# EAGLE board Zcontrol5XR2_Production (EAGLE 5.10)
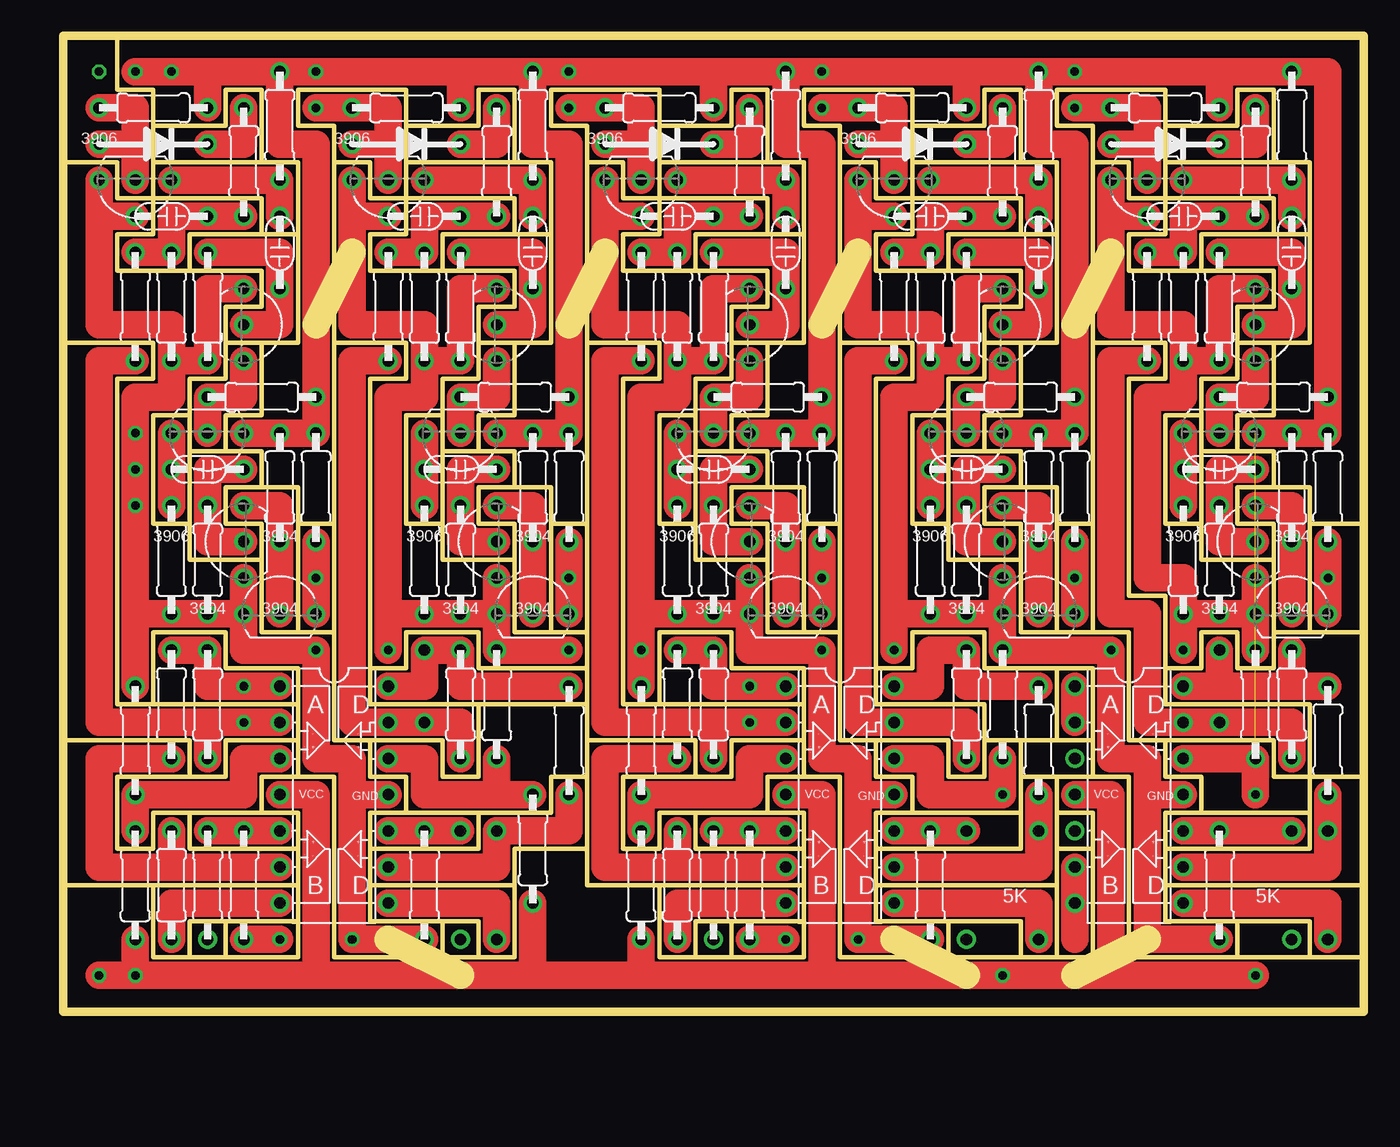
[diagram p0: board, top side]
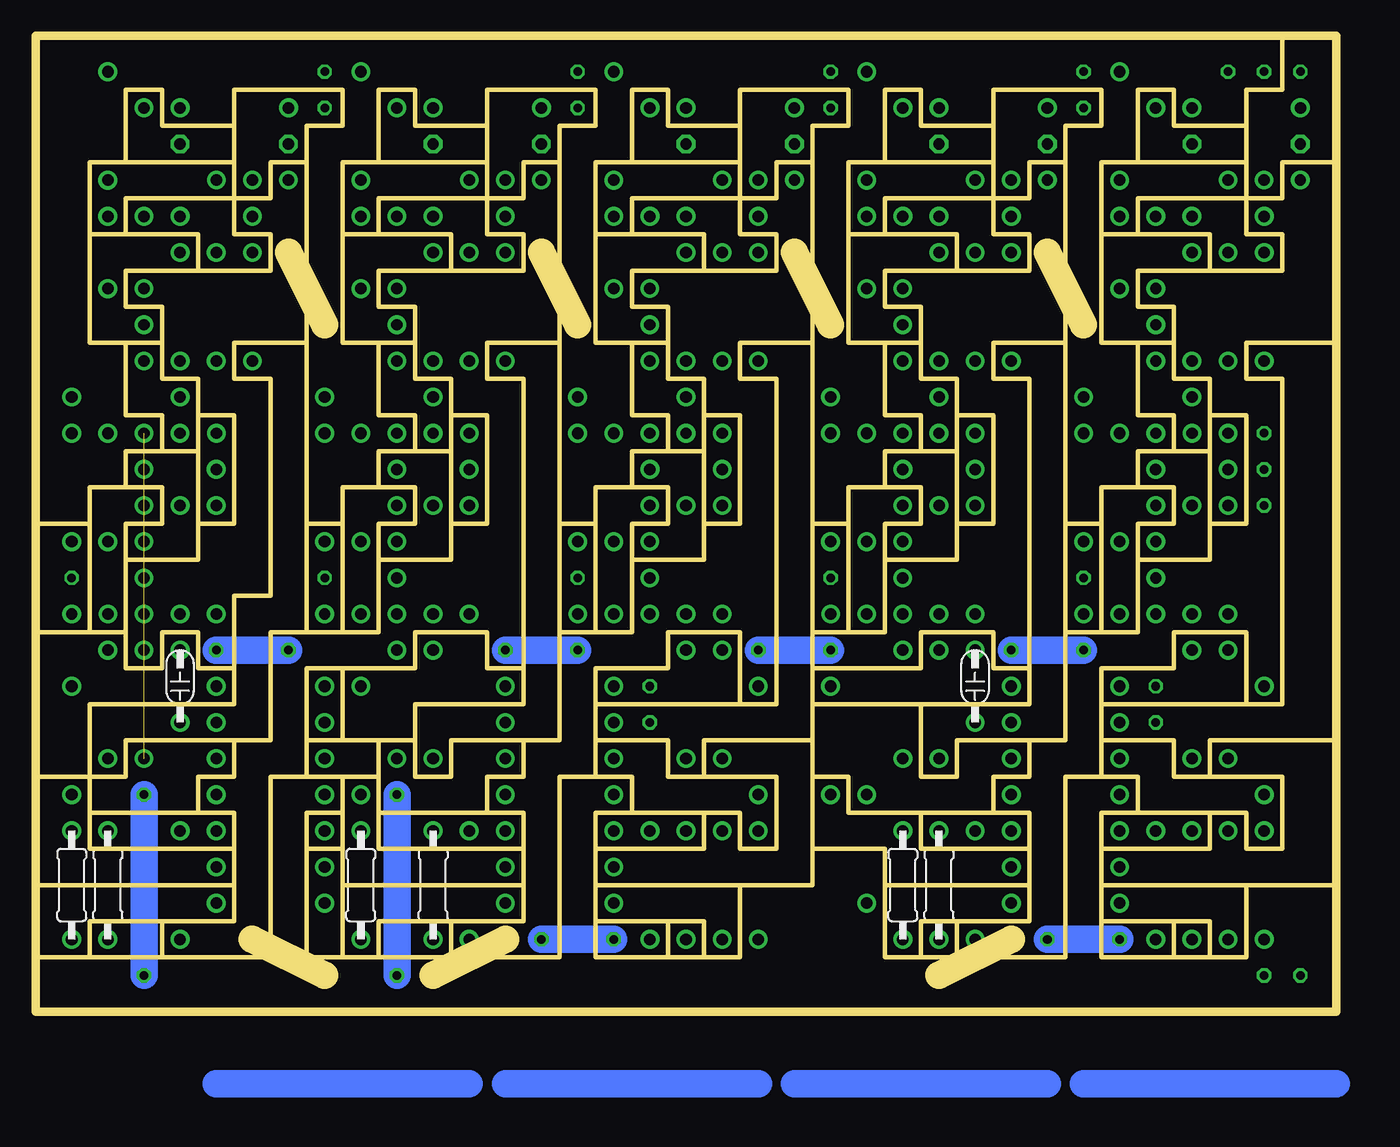
[diagram p1: board, bottom side, seen from below]

Size 91.44 x 68.58 mm. Coordinates in mm from the lower left corner, seen from the top.
Outline: 91.44,3.81 91.44,0 0,0 0,8.89
Outline: 91.44,3.81 91.44,8.89
Outline: 91.44,8.89 91.44,16.51
Outline: 91.44,16.51 91.44,26.67
Outline: 91.44,26.67 91.44,34.29
Outline: 91.44,34.29 91.44,68.58 3.81,68.58
Outline: 3.81,68.58 0,68.58 0,59.69
Outline: 0,59.69 0,46.99
Outline: 0,46.99 0,19.05
Outline: 0,19.05 0,8.89
Outline: 0,8.89 6.35,8.89
Outline: 6.35,8.89 6.35,3.81 8.89,3.81
Outline: 8.89,3.81 11.43,3.81
Outline: 11.43,3.81 16.51,3.81 16.51,6.35
Outline: 16.51,6.35 16.51,8.89
Outline: 16.51,8.89 16.51,11.43
Outline: 16.51,11.43 16.51,13.97 13.97,13.97
Outline: 13.97,13.97 13.97,16.51 16.51,16.51
Outline: 16.51,16.51 19.05,16.51 19.05,3.81 26.67,3.81
Outline: 26.67,3.81 29.21,3.81
Outline: 29.21,3.81 31.75,3.81 31.75,8.89
Outline: 44.45,3.81 41.91,3.81 41.91,8.89
Outline: 44.45,3.81 46.99,3.81
Outline: 46.99,3.81 52.07,3.81 52.07,6.35
Outline: 52.07,6.35 52.07,8.89
Outline: 52.07,8.89 52.07,11.43
Outline: 52.07,11.43 52.07,13.97 49.53,13.97
Outline: 49.53,13.97 49.53,16.51 52.07,16.51
Outline: 52.07,16.51 54.61,16.51 54.61,3.81 62.23,3.81
Outline: 62.23,3.81 67.31,3.81
Outline: 67.31,3.81 69.85,3.81
Outline: 69.85,3.81 72.39,3.81 72.39,11.43
Outline: 72.39,11.43 72.39,13.97 69.85,13.97
Outline: 69.85,13.97 69.85,16.51
Outline: 69.85,16.51 72.39,16.51
Outline: 72.39,16.51 74.93,16.51 74.93,3.81 82.55,3.81
Outline: 82.55,3.81 87.63,3.81
Outline: 87.63,3.81 91.44,3.81
Outline: 62.23,3.81 62.23,6.35
Outline: 62.23,6.35 57.15,6.35 57.15,8.89
Outline: 57.15,8.89 57.15,11.43
Outline: 57.15,11.43 57.15,13.97 59.69,13.97
Outline: 59.69,13.97 59.69,16.51 57.15,16.51 57.15,19.05
Outline: 57.15,19.05 54.61,19.05 54.61,26.67
Outline: 54.61,26.67 52.07,26.67
Outline: 52.07,26.67 49.53,26.67 49.53,31.75
Outline: 44.45,41.91 41.91,41.91 41.91,34.29 44.45,34.29
Outline: 44.45,41.91 44.45,44.45 46.99,44.45 46.99,46.99
Outline: 46.99,46.99 46.99,49.53 49.53,49.53 49.53,52.07 44.45,52.07
Outline: 44.45,52.07 39.37,52.07 39.37,54.61 41.91,54.61 41.91,57.15
Outline: 41.91,57.15 39.37,57.15 39.37,59.69 36.83,59.69
Outline: 36.83,59.69 36.83,46.99
Outline: 36.83,46.99 41.91,46.99 41.91,44.45 39.37,44.45 39.37,21.59 41.91,21.59
Outline: 41.91,21.59 41.91,26.67 46.99,26.67 46.99,24.13 52.07,24.13 52.07,21.59
Outline: 52.07,21.59 52.07,19.05
Outline: 52.07,19.05 52.07,16.51
Outline: 52.07,21.59 41.91,21.59
Outline: 52.07,19.05 46.99,19.05 46.99,16.51 44.45,16.51
Outline: 44.45,16.51 44.45,19.05 36.83,19.05
Outline: 36.83,19.05 36.83,21.59
Outline: 36.83,21.59 36.83,24.13
Outline: 36.83,24.13 36.83,26.67
Outline: 36.83,26.67 36.83,34.29
Outline: 36.83,34.29 36.83,46.99
Outline: 52.07,8.89 41.91,8.89
Outline: 44.45,3.81 44.45,6.35 46.99,6.35
Outline: 46.99,6.35 52.07,6.35
Outline: 46.99,6.35 46.99,3.81
Outline: 69.85,3.81 69.85,8.89
Outline: 69.85,8.89 69.85,11.43
Outline: 69.85,11.43 69.85,13.97
Outline: 72.39,11.43 69.85,11.43
Outline: 69.85,8.89 57.15,8.89
Outline: 62.23,6.35 67.31,6.35 67.31,3.81
Outline: 57.15,11.43 67.31,11.43 67.31,13.97
Outline: 67.31,13.97 59.69,13.97
Outline: 57.15,19.05 62.23,19.05 62.23,16.51 64.77,16.51 64.77,19.05
Outline: 64.77,19.05 67.31,19.05
Outline: 67.31,19.05 67.31,16.51
Outline: 67.31,16.51 67.31,13.97
Outline: 69.85,16.51 67.31,16.51
Outline: 72.39,16.51 72.39,19.05
Outline: 72.39,19.05 69.85,19.05
Outline: 69.85,19.05 67.31,19.05
Outline: 72.39,19.05 72.39,24.13 69.85,24.13
Outline: 69.85,24.13 69.85,19.05
Outline: 64.77,19.05 64.77,21.59 57.15,21.59 57.15,24.13
Outline: 57.15,24.13 59.69,24.13 59.69,26.67 64.77,26.67 64.77,24.13 69.85,24.13
Outline: 91.44,8.89 77.47,8.89
Outline: 77.47,8.89 77.47,6.35 82.55,6.35
Outline: 82.55,6.35 87.63,6.35 87.63,3.81
Outline: 82.55,3.81 82.55,6.35
Outline: 77.47,8.89 77.47,11.43
Outline: 77.47,11.43 77.47,13.97 80.01,13.97
Outline: 80.01,13.97 80.01,16.51 77.47,16.51 77.47,19.05
Outline: 77.47,19.05 74.93,19.05 74.93,26.67 72.39,26.67
Outline: 72.39,26.67 69.85,26.67
Outline: 69.85,26.67 67.31,26.67 67.31,31.75
Outline: 67.31,31.75 62.23,31.75 62.23,34.29
Outline: 62.23,34.29 59.69,34.29 59.69,41.91 62.23,41.91
Outline: 62.23,41.91 62.23,44.45 64.77,44.45 64.77,46.99
Outline: 64.77,46.99 64.77,49.53 67.31,49.53 67.31,52.07 62.23,52.07
Outline: 62.23,52.07 57.15,52.07 57.15,54.61 59.69,54.61 59.69,57.15
Outline: 59.69,57.15 57.15,57.15 57.15,59.69 54.61,59.69
Outline: 54.61,59.69 54.61,46.99
Outline: 54.61,46.99 59.69,46.99 59.69,44.45 57.15,44.45 57.15,24.13
Outline: 72.39,26.67 72.39,34.29
Outline: 72.39,34.29 69.85,34.29
Outline: 69.85,34.29 69.85,26.67
Outline: 69.85,34.29 69.85,36.83 67.31,36.83
Outline: 67.31,36.83 64.77,36.83 64.77,34.29 67.31,34.29 67.31,31.75
Outline: 67.31,36.83 67.31,39.37 64.77,39.37
Outline: 64.77,39.37 62.23,39.37
Outline: 62.23,39.37 62.23,34.29
Outline: 62.23,39.37 62.23,41.91
Outline: 64.77,39.37 64.77,41.91 67.31,41.91 67.31,46.99
Outline: 67.31,46.99 69.85,46.99 69.85,54.61
Outline: 67.31,46.99 64.77,46.99
Outline: 72.39,46.99 72.39,59.69
Outline: 72.39,59.69 72.39,62.23 69.85,62.23 69.85,64.77 77.47,64.77 77.47,62.23
Outline: 77.47,62.23 82.55,62.23 82.55,64.77 85.09,64.77 85.09,59.69
Outline: 87.63,54.61 87.63,59.69 85.09,59.69
Outline: 87.63,54.61 87.63,46.99 85.09,46.99
Outline: 82.55,39.37 82.55,41.91 85.09,41.91 85.09,46.99
Outline: 82.55,39.37 85.09,39.37 85.09,36.83
Outline: 69.85,54.61 69.85,59.69 67.31,59.69
Outline: 59.69,62.23 64.77,62.23 64.77,64.77 67.31,64.77 67.31,59.69
Outline: 59.69,62.23 59.69,64.77 52.07,64.77 52.07,62.23 54.61,62.23 54.61,59.69
Outline: 69.85,54.61 67.31,54.61
Outline: 67.31,54.61 62.23,54.61 62.23,52.07
Outline: 67.31,54.61 67.31,57.15 59.69,57.15
Outline: 59.69,57.15 59.69,59.69
Outline: 59.69,62.23 59.69,59.69
Outline: 59.69,59.69 67.31,59.69
Outline: 36.83,59.69 36.83,62.23 34.29,62.23 34.29,64.77 41.91,64.77 41.91,62.23
Outline: 41.91,59.69 41.91,57.15
Outline: 41.91,57.15 49.53,57.15 49.53,54.61
Outline: 49.53,54.61 44.45,54.61 44.45,52.07
Outline: 41.91,59.69 49.53,59.69
Outline: 49.53,59.69 52.07,59.69 52.07,54.61
Outline: 52.07,54.61 52.07,46.99 49.53,46.99
Outline: 49.53,46.99 49.53,41.91 46.99,41.91 46.99,39.37
Outline: 46.99,39.37 49.53,39.37 49.53,36.83
Outline: 49.53,46.99 46.99,46.99
Outline: 49.53,54.61 52.07,54.61
Outline: 49.53,59.69 49.53,64.77 46.99,64.77 46.99,62.23 41.91,62.23
Outline: 41.91,62.23 41.91,59.69
Outline: 85.09,59.69 77.47,59.69
Outline: 77.47,59.69 77.47,62.23
Outline: 87.63,54.61 85.09,54.61
Outline: 85.09,54.61 85.09,57.15 77.47,57.15
Outline: 77.47,57.15 77.47,59.69
Outline: 77.47,57.15 74.93,57.15 74.93,59.69 72.39,59.69
Outline: 24.13,62.23 24.13,59.69
Outline: 24.13,59.69 31.75,59.69
Outline: 31.75,59.69 31.75,64.77 29.21,64.77 29.21,62.23 24.13,62.23
Outline: 24.13,62.23 24.13,64.77 16.51,64.77 16.51,62.23 19.05,62.23 19.05,59.69
Outline: 19.05,59.69 21.59,59.69 21.59,57.15 24.13,57.15
Outline: 24.13,57.15 24.13,59.69
Outline: 31.75,59.69 34.29,59.69 34.29,54.61
Outline: 34.29,54.61 34.29,46.99 31.75,46.99
Outline: 31.75,46.99 31.75,41.91 29.21,41.91 29.21,39.37
Outline: 29.21,39.37 31.75,39.37 31.75,36.83
Outline: 0,59.69 3.81,59.69 3.81,57.15 6.35,57.15
Outline: 6.35,57.15 6.35,59.69
Outline: 6.35,59.69 6.35,62.23
Outline: 6.35,62.23 6.35,64.77 3.81,64.77 3.81,68.58
Outline: 13.97,59.69 16.51,59.69 16.51,54.61
Outline: 16.51,54.61 16.51,46.99 13.97,46.99
Outline: 13.97,46.99 13.97,41.91 11.43,41.91 11.43,39.37
Outline: 11.43,39.37 13.97,39.37 13.97,36.83
Outline: 19.05,46.99 19.05,59.69
Outline: 13.97,59.69 13.97,64.77 11.43,64.77 11.43,62.23 6.35,62.23
Outline: 6.35,59.69 13.97,59.69
Outline: 6.35,57.15 13.97,57.15 13.97,54.61
Outline: 13.97,54.61 16.51,54.61
Outline: 24.13,57.15 31.75,57.15 31.75,54.61
Outline: 31.75,54.61 34.29,54.61
Outline: 6.35,57.15 6.35,54.61 3.81,54.61 3.81,52.07 8.89,52.07
Outline: 8.89,52.07 8.89,54.61 13.97,54.61
Outline: 24.13,57.15 24.13,54.61 21.59,54.61 21.59,52.07 26.67,52.07
Outline: 26.67,52.07 26.67,54.61 31.75,54.61
Outline: 19.05,46.99 24.13,46.99 24.13,44.45 21.59,44.45 21.59,24.13
Outline: 21.59,24.13 21.59,21.59 29.21,21.59
Outline: 29.21,21.59 29.21,16.51 26.67,16.51 26.67,19.05 21.59,19.05
Outline: 21.59,19.05 19.05,19.05 19.05,26.67
Outline: 19.05,26.67 19.05,34.29
Outline: 19.05,34.29 19.05,46.99
Outline: 6.35,21.59 3.81,21.59 3.81,44.45 6.35,44.45 6.35,46.99 0,46.99
Outline: 6.35,21.59 16.51,21.59
Outline: 16.51,21.59 16.51,19.05
Outline: 16.51,19.05 11.43,19.05 11.43,16.51 8.89,16.51
Outline: 8.89,16.51 8.89,19.05 0,19.05
Outline: 13.97,46.99 11.43,46.99
Outline: 11.43,46.99 11.43,49.53 13.97,49.53 13.97,52.07 8.89,52.07
Outline: 31.75,46.99 29.21,46.99
Outline: 29.21,46.99 29.21,49.53 31.75,49.53 31.75,52.07 26.67,52.07
Outline: 85.09,46.99 82.55,46.99
Outline: 82.55,46.99 82.55,49.53 85.09,49.53 85.09,52.07 80.01,52.07
Outline: 80.01,52.07 80.01,54.61 85.09,54.61
Outline: 80.01,52.07 74.93,52.07 74.93,54.61 77.47,54.61 77.47,57.15
Outline: 80.01,34.29 77.47,34.29 77.47,41.91 80.01,41.91
Outline: 80.01,34.29 80.01,39.37
Outline: 80.01,39.37 80.01,41.91
Outline: 44.45,34.29 44.45,39.37
Outline: 44.45,39.37 44.45,41.91
Outline: 26.67,41.91 24.13,41.91 24.13,34.29 26.67,34.29
Outline: 26.67,41.91 26.67,39.37
Outline: 26.67,39.37 26.67,34.29
Outline: 8.89,34.29 6.35,34.29 6.35,41.91 8.89,41.91
Outline: 8.89,34.29 8.89,39.37
Outline: 8.89,39.37 8.89,41.91
Outline: 8.89,39.37 11.43,39.37
Outline: 26.67,39.37 29.21,39.37
Outline: 46.99,39.37 44.45,39.37
Outline: 82.55,39.37 80.01,39.37
Outline: 80.01,41.91 80.01,44.45 82.55,44.45 82.55,46.99
Outline: 8.89,34.29 8.89,31.75 13.97,31.75
Outline: 13.97,31.75 13.97,34.29 11.43,34.29 11.43,36.83 13.97,36.83
Outline: 26.67,34.29 26.67,31.75 31.75,31.75
Outline: 31.75,31.75 31.75,34.29 29.21,34.29 29.21,36.83 31.75,36.83
Outline: 49.53,31.75 49.53,34.29 46.99,34.29 46.99,36.83 49.53,36.83
Outline: 49.53,31.75 44.45,31.75 44.45,34.29
Outline: 80.01,34.29 80.01,31.75 85.09,31.75
Outline: 85.09,31.75 85.09,34.29 82.55,34.29 82.55,36.83 85.09,36.83
Outline: 19.05,26.67 16.51,26.67
Outline: 16.51,26.67 16.51,34.29
Outline: 16.51,34.29 19.05,34.29
Outline: 36.83,26.67 34.29,26.67
Outline: 34.29,26.67 34.29,34.29
Outline: 34.29,34.29 36.83,34.29
Outline: 54.61,26.67 54.61,34.29
Outline: 54.61,34.29 52.07,34.29
Outline: 52.07,34.29 52.07,26.67
Outline: 87.63,26.67 91.44,26.67
Outline: 87.63,26.67 87.63,34.29
Outline: 87.63,34.29 91.44,34.29
Outline: 87.63,34.29 87.63,36.83 85.09,36.83
Outline: 85.09,31.75 85.09,26.67
Outline: 85.09,26.67 87.63,26.67
Outline: 52.07,34.29 52.07,36.83 49.53,36.83
Outline: 34.29,26.67 31.75,26.67 31.75,31.75
Outline: 34.29,34.29 34.29,36.83 31.75,36.83
Outline: 16.51,26.67 13.97,26.67 13.97,31.75
Outline: 16.51,34.29 16.51,36.83 13.97,36.83
Outline: 54.61,34.29 54.61,46.99
Outline: 72.39,34.29 72.39,46.99
Outline: 72.39,46.99 77.47,46.99 77.47,44.45 74.93,44.45 74.93,29.21 77.47,29.21 77.47,24.13
Outline: 77.47,24.13 77.47,21.59 87.63,21.59 87.63,16.51
Outline: 87.63,16.51 85.09,16.51 85.09,19.05 77.47,19.05
Outline: 80.01,13.97 87.63,13.97
Outline: 87.63,13.97 87.63,16.51
Outline: 87.63,16.51 91.44,16.51
Outline: 77.47,11.43 87.63,11.43 87.63,13.97
Outline: 77.47,24.13 80.01,24.13 80.01,26.67 82.55,26.67 82.55,24.13 85.09,24.13 85.09,26.67
Outline: 41.91,8.89 36.83,8.89 36.83,11.43
Outline: 36.83,11.43 36.83,16.51
Outline: 36.83,16.51 36.83,19.05
Outline: 44.45,16.51 39.37,16.51 39.37,11.43 41.91,11.43 41.91,13.97 44.45,13.97
Outline: 44.45,13.97 44.45,11.43 52.07,11.43
Outline: 49.53,13.97 44.45,13.97
Outline: 21.59,19.05 21.59,16.51 24.13,16.51 24.13,13.97
Outline: 24.13,13.97 21.59,13.97 21.59,11.43
Outline: 21.59,11.43 21.59,8.89
Outline: 21.59,8.89 21.59,6.35 26.67,6.35
Outline: 26.67,6.35 26.67,3.81
Outline: 29.21,3.81 29.21,6.35 26.67,6.35
Outline: 21.59,8.89 31.75,8.89
Outline: 31.75,8.89 31.75,11.43 36.83,11.43
Outline: 21.59,11.43 29.21,11.43 29.21,13.97
Outline: 29.21,13.97 34.29,13.97 34.29,16.51 36.83,16.51
Outline: 29.21,13.97 24.13,13.97
Outline: 29.21,21.59 36.83,21.59
Outline: 36.83,24.13 29.21,24.13 29.21,26.67 24.13,26.67 24.13,24.13 21.59,24.13
Outline: 16.51,21.59 16.51,24.13 11.43,24.13 11.43,26.67 6.35,26.67 6.35,21.59
Outline: 8.89,41.91 8.89,44.45 11.43,44.45 11.43,46.99
Outline: 11.43,3.81 11.43,6.35
Outline: 11.43,6.35 8.89,6.35 8.89,3.81
Outline: 6.35,8.89 16.51,8.89
Outline: 16.51,6.35 11.43,6.35
Outline: 16.51,11.43 8.89,11.43 8.89,13.97
Outline: 8.89,13.97 6.35,13.97 6.35,11.43 3.81,11.43 3.81,16.51 8.89,16.51
Outline: 13.97,13.97 8.89,13.97
Outline: 16.51,19.05 16.51,16.51
Outline: 26.67,41.91 26.67,44.45 29.21,44.45 29.21,46.99
Copper layers (1*16): Top 0.035mm / dielectric 1.5mm / Bottom 0.035mm
Design rules "default": minimum track width 10mil, minimum drill 24mil, track to track 8mil, track to pad 8mil, pad to pad 8mil, via to via 8mil, smd to smd 8mil, copper to edge 40mil, drill to drill 8mil, minimum pad ring 10mil, minimum via ring 8mil, stop-mask expansion 4mil, vias tented up to drill 0mil, thermal gap 10mil
Milling: 7 lines

## Footprints (pad centres in the part's own frame; a part is rotated, then mirrored left to right if it is on the bottom)
SMALL-CAPACITOR = drill 0.813 round: IN1 0,0; IN2 5.08,0
TRANSISTOR = drill 0.8 round: P$1 0,0; P$2 2.54,0; P$3 -2.54,0
DIODE = drill 0.8 octagon: P$1 -3.81,0; P$2 3.81,0
RESISTOR = drill 0.813 round: IN1 -3.81,0; IN2 3.81,0
LM324-QUAD-OPAMP = drill 0.813 round: AMINUS -3.81,5.08; AOUT -3.81,7.62; APLUS -3.81,2.54; BMINUS -3.81,-5.08; BOUT -3.81,-7.62; BPLUS -3.81,-2.54; CMINUS 3.81,5.08; COUT 3.81,7.62; CPLUS 3.81,2.54; DMINUS 3.81,-5.08; DOUT 3.81,-7.62; DPLUS 3.81,-2.54; GND 3.81,0; VCC -3.81,0

## Placement (x,y rotation side)
E$2  50nF  [SMALL-CAPACITOR]  25.4,20.32 90 bottom
E$3  [TRANSISTOR]  5.08,58.42 180 top
E$5  [DIODE]  6.35,60.96 0 top
E$7  4k  [RESISTOR]  6.35,63.5 180 top
E$9  910  [RESISTOR]  12.7,59.69 270 top
E$10  2.2uF  [SMALL-CAPACITOR]  10.16,55.88 180 top
E$11  [LM324-QUAD-OPAMP]  19.05,15.24 0 top
E$15  100k  [RESISTOR]  7.62,49.53 90 top
E$16  100k  [RESISTOR]  5.08,49.53 270 top
E$18  [TRANSISTOR]  22.86,58.42 180 top
E$19  200k  [RESISTOR]  10.16,21.59 270 top
E$20  2k  [RESISTOR]  5.08,19.05 90 top
E$21  5k  [RESISTOR]  5.08,8.89 270 top
E$22  2k  [RESISTOR]  7.62,21.59 270 top
E$23  2k  [RESISTOR]  7.62,8.89 270 top
E$29  2k  [RESISTOR]  12.7,8.89 270 top
E$30  20k  [RESISTOR]  10.16,8.89 270 top
E$31  10K  [RESISTOR]  15.24,62.23 270 top
E$32  500Pf  [SMALL-CAPACITOR]  15.24,50.8 90 top
E$33  100K  [RESISTOR]  10.16,49.53 90 top
E$34  [TRANSISTOR]  12.7,48.26 270 top
E$35  2k  [RESISTOR]  13.97,43.18 0 top
E$36  [TRANSISTOR]  10.16,40.64 180 top
E$37  22Pf  [SMALL-CAPACITOR]  12.7,38.1 180 top
E$38  4k  [RESISTOR]  24.13,63.5 180 top
E$40  100k  [RESISTOR]  10.16,31.75 90 top
E$43  [TRANSISTOR]  12.7,33.02 90 top
E$44  2k  [RESISTOR]  15.24,36.83 90 top
E$45  [TRANSISTOR]  15.24,27.94 0 top
E$46  2k  [RESISTOR]  17.78,36.83 90 top
E$47  200k  [RESISTOR]  27.94,21.59 270 top
E$48  2k  [RESISTOR]  30.48,21.59 90 top
E$49  5k  [RESISTOR]  33.02,11.43 270 top
E$50  2k  [RESISTOR]  35.56,19.05 270 top
E$52  2k  [RESISTOR]  30.48,8.89 270 bottom
E$53  2k  [RESISTOR]  25.4,8.89 270 top
E$54  20k  [RESISTOR]  27.94,8.89 270 bottom
E$55  [DIODE]  24.13,60.96 0 top
E$56  910  [RESISTOR]  30.48,59.69 270 top
E$57  2.2uF  [SMALL-CAPACITOR]  27.94,55.88 180 top
E$58  100k  [RESISTOR]  25.4,49.53 90 top
E$59  100k  [RESISTOR]  22.86,49.53 270 top
E$60  10K  [RESISTOR]  33.02,62.23 270 top
E$61  500Pf  [SMALL-CAPACITOR]  33.02,50.8 90 top
E$62  100K  [RESISTOR]  27.94,49.53 90 top
E$63  [TRANSISTOR]  30.48,48.26 270 top
E$64  2k  [RESISTOR]  31.75,43.18 0 top
E$65  [TRANSISTOR]  27.94,40.64 180 top
E$66  100k  [RESISTOR]  27.94,31.75 90 top
E$67  [TRANSISTOR]  30.48,33.02 90 top
E$68  2k  [RESISTOR]  33.02,36.83 90 top
E$69  [TRANSISTOR]  33.02,27.94 0 top
E$70  2k  [RESISTOR]  35.56,36.83 90 top
E$71  2k  [RESISTOR]  25.4,31.75 270 top
E$72  22Pf  [SMALL-CAPACITOR]  30.48,38.1 180 top
E$73  [LM324-QUAD-OPAMP]  54.61,15.24 0 top
E$74  [TRANSISTOR]  40.64,58.42 180 top
E$75  2k  [RESISTOR]  7.62,31.75 270 top
E$76  4k  [RESISTOR]  41.91,63.5 180 top
E$77  [DIODE]  41.91,60.96 0 top
E$78  910  [RESISTOR]  48.26,59.69 270 top
E$79  2.2uF  [SMALL-CAPACITOR]  45.72,55.88 180 top
E$80  100k  [RESISTOR]  43.18,49.53 90 top
E$81  100k  [RESISTOR]  40.64,49.53 270 top
E$82  200k  [RESISTOR]  45.72,21.59 270 top
E$83  2k  [RESISTOR]  40.64,19.05 90 top
E$84  5k  [RESISTOR]  40.64,8.89 270 top
E$85  2k  [RESISTOR]  43.18,21.59 270 top
E$86  2k  [RESISTOR]  43.18,8.89 270 top
E$87  2k  [RESISTOR]  48.26,8.89 270 top
E$88  20k  [RESISTOR]  45.72,8.89 270 top
E$89  10K  [RESISTOR]  50.8,62.23 270 top
E$90  500Pf  [SMALL-CAPACITOR]  50.8,50.8 90 top
E$91  100K  [RESISTOR]  45.72,49.53 90 top
E$92  [TRANSISTOR]  48.26,48.26 270 top
E$93  2k  [RESISTOR]  49.53,43.18 0 top
E$94  [TRANSISTOR]  45.72,40.64 180 top
E$95  100k  [RESISTOR]  45.72,31.75 90 top
E$96  [TRANSISTOR]  48.26,33.02 90 top
E$97  2k  [RESISTOR]  50.8,36.83 90 top
E$98  [TRANSISTOR]  50.8,27.94 0 top
E$99  2k  [RESISTOR]  53.34,36.83 90 top
E$100  200k  [RESISTOR]  86.36,21.59 270 top
E$101  200k  [RESISTOR]  63.5,21.59 270 top
E$102  2k  [RESISTOR]  66.04,21.59 90 top
E$104  2k  [RESISTOR]  68.58,19.05 270 top
E$105  2k  [RESISTOR]  68.58,8.89 270 bottom
E$106  2k  [RESISTOR]  60.96,8.89 270 top
E$107  20k  [RESISTOR]  63.5,8.89 270 bottom
E$108  2k  [RESISTOR]  43.18,31.75 270 top
E$109  22Pf  [SMALL-CAPACITOR]  48.26,38.1 180 top
E$110  [TRANSISTOR]  58.42,58.42 180 top
E$111  4k  [RESISTOR]  59.69,63.5 180 top
E$112  [DIODE]  59.69,60.96 0 top
E$113  910  [RESISTOR]  66.04,59.69 270 top
E$114  2.2uF  [SMALL-CAPACITOR]  63.5,55.88 180 top
E$115  100k  [RESISTOR]  60.96,49.53 90 top
E$116  100k  [RESISTOR]  58.42,49.53 270 top
E$117  10K  [RESISTOR]  68.58,62.23 270 top
E$118  500Pf  [SMALL-CAPACITOR]  68.58,50.8 90 top
E$119  100K  [RESISTOR]  63.5,49.53 90 top
E$120  [TRANSISTOR]  66.04,48.26 270 top
E$121  2k  [RESISTOR]  67.31,43.18 0 top
E$122  [TRANSISTOR]  63.5,40.64 180 top
E$123  100k  [RESISTOR]  63.5,31.75 90 top
E$124  [TRANSISTOR]  66.04,33.02 90 top
E$125  2k  [RESISTOR]  68.58,36.83 90 top
E$126  [TRANSISTOR]  68.58,27.94 0 top
E$127  2k  [RESISTOR]  71.12,36.83 90 top
E$128  2k  [RESISTOR]  60.96,31.75 270 top
E$129  22Pf  [SMALL-CAPACITOR]  66.04,38.1 180 top
E$156  [LM324-QUAD-OPAMP]  74.93,15.24 0 top
E$157  50nF  [SMALL-CAPACITOR]  81.28,20.32 90 bottom
E$159  2k  [RESISTOR]  83.82,21.59 90 top
E$161  2k  [RESISTOR]  88.9,19.05 270 top
E$162  2k  [RESISTOR]  88.9,8.89 270 bottom
E$163  2k  [RESISTOR]  81.28,8.89 270 top
E$166  20k  [RESISTOR]  86.36,8.89 270 bottom
E$167  [TRANSISTOR]  76.2,58.42 180 top
E$168  4k  [RESISTOR]  77.47,63.5 180 top
E$169  [DIODE]  77.47,60.96 0 top
E$170  910  [RESISTOR]  83.82,59.69 270 top
E$171  2.2uF  [SMALL-CAPACITOR]  81.28,55.88 180 top
E$172  100k  [RESISTOR]  78.74,49.53 90 top
E$173  100k  [RESISTOR]  76.2,49.53 270 top
E$174  10K  [RESISTOR]  86.36,62.23 270 top
E$175  500Pf  [SMALL-CAPACITOR]  86.36,50.8 90 top
E$176  100K  [RESISTOR]  81.28,49.53 90 top
E$177  [TRANSISTOR]  83.82,48.26 270 top
E$178  2k  [RESISTOR]  85.09,43.18 0 top
E$179  [TRANSISTOR]  81.28,40.64 180 top
E$180  100k  [RESISTOR]  81.28,31.75 90 top
E$181  [TRANSISTOR]  83.82,33.02 90 top
E$182  2k  [RESISTOR]  86.36,36.83 90 top
E$183  [TRANSISTOR]  86.36,27.94 0 top
E$184  2k  [RESISTOR]  88.9,36.83 90 top
E$185  2k  [RESISTOR]  78.74,31.75 270 top
E$186  22Pf  [SMALL-CAPACITOR]  83.82,38.1 180 top

## Library data of the parts
E$2 E$3 E$5 E$7 E$9-E$11 E$15 E$16 E$18-E$23 E$29-E$38 E$40 E$43-E$50 E$52-E$102 E$104-E$129 E$156 E$157 E$159 E$161-E$163 E$166-E$186 = RussellLibrary

## Nets
GND4: E$3.P$2 E$10.IN2 E$11.GND E$15.IN1 E$18.P$2 E$20.IN2 E$29.IN2 E$33.IN1 E$34.P$3 E$40.IN1 E$43.P$3 E$45.P$3 E$48.IN2 E$53.IN2 E$57.IN2 E$58.IN1 E$62.IN1 E$63.P$3 E$66.IN1 E$67.P$3 E$69.P$3 E$73.GND E$74.P$2 E$79.IN2 E$80.IN1 E$83.IN2 E$87.IN2 E$91.IN1 E$92.P$3 E$95.IN1 E$96.P$3 E$98.P$3 E$102.IN2 E$106.IN2 E$110.P$2 E$114.IN2 E$115.IN1 E$119.IN1 E$120.P$3 E$123.IN1 E$124.P$3 E$126.P$3 E$156.GND E$159.IN2 E$163.IN2 E$167.P$2 E$171.IN2 E$172.IN1 E$176.IN1 E$177.P$3 E$180.IN1 E$181.P$3 E$183.P$3
S$1: E$3.P$1 E$5.P$1 E$7.IN2
S$2: E$5.P$2 E$9.IN1
S$4: E$9.IN2 E$10.IN1 E$15.IN2 E$16.IN1
S$5: E$11.AMINUS E$16.IN2 E$19.IN2
S$6: E$32.IN1 E$33.IN2 E$34.P$1
S$7: E$11.APLUS E$20.IN1 E$21.IN1
S$8: E$11.AOUT E$19.IN1 E$22.IN1
S$9: E$18.P$1 E$38.IN2 E$55.P$1
S$10: E$11.BMINUS E$22.IN2 E$23.IN1
S$11: E$11.BOUT E$23.IN2
S$12: E$11.BPLUS E$29.IN1 E$30.IN1
S$13: E$30.IN2
S$14: E$3.P$3 E$31.IN2 E$32.IN2
S$15: E$47.IN2 E$59.IN2
S$16: E$2.IN2 E$47.IN1 E$50.IN1
S$17: E$34.P$2 E$35.IN1 E$36.P$1
S$18: E$50.IN2 E$52.IN1
S$19: E$36.P$2 E$75.IN1
S$20: E$37.IN1 E$40.IN2 E$43.P$1
S$22: E$52.IN2
S$23: E$43.P$2 E$44.IN1 E$45.P$1
S$24: E$45.P$2 E$46.IN1
S$26: E$53.IN1 E$54.IN1
S$27: E$54.IN2
S$28: E$55.P$2 E$56.IN1
S$29: E$74.P$1 E$76.IN2 E$77.P$1
S$30: E$11.CPLUS E$48.IN1 E$49.IN1
S$31: E$18.P$3 E$60.IN2 E$61.IN2
S$32: E$61.IN1 E$62.IN2 E$63.P$1
S$33: E$63.P$2 E$64.IN1 E$65.P$1
S$34: E$66.IN2 E$67.P$1 E$72.IN1
S$35: E$67.P$2 E$68.IN1 E$69.P$1
S$36: E$69.P$2 E$70.IN1
S$37: E$65.P$2 E$71.IN1
S$38: E$56.IN2 E$57.IN1 E$58.IN2 E$59.IN1
S$39: E$77.P$2 E$78.IN1
S$40: E$73.AMINUS E$81.IN2 E$82.IN2
S$41: E$73.APLUS E$83.IN1 E$84.IN1
S$42: E$73.AOUT E$82.IN1 E$85.IN1
S$43: E$73.BMINUS E$85.IN2 E$86.IN1
S$44: E$73.BOUT E$86.IN2
S$45: E$73.BPLUS E$87.IN1 E$88.IN1
S$46: E$88.IN2
S$47: E$74.P$3 E$89.IN2 E$90.IN2
S$48: E$90.IN1 E$91.IN2 E$92.P$1
S$49: E$92.P$2 E$93.IN1 E$94.P$1
S$50: E$95.IN2 E$96.P$1 E$109.IN1
S$51: E$96.P$2 E$97.IN1 E$98.P$1
S$52: E$98.P$2 E$99.IN1
S$53: E$94.P$2 E$108.IN1
S$54: E$78.IN2 E$79.IN1 E$80.IN2 E$81.IN1
S$55: E$101.IN1 E$104.IN1
S$56: E$104.IN2 E$105.IN1
S$57: E$105.IN2
S$58: E$106.IN1 E$107.IN1
S$59: E$107.IN2
S$60: E$101.IN2 E$116.IN2
S$61: E$100.IN2 E$173.IN2
S$62: E$110.P$1 E$111.IN2 E$112.P$1
S$63: E$112.P$2 E$113.IN1
S$64: E$110.P$3 E$117.IN2 E$118.IN2
S$65: E$118.IN1 E$119.IN2 E$120.P$1
S$66: E$120.P$2 E$121.IN1 E$122.P$1
S$67: E$123.IN2 E$124.P$1 E$129.IN1
S$68: E$124.P$2 E$125.IN1 E$126.P$1
S$69: E$126.P$2 E$127.IN1
S$70: E$122.P$2 E$128.IN1
S$71: E$113.IN2 E$114.IN1 E$115.IN2 E$116.IN1
S$89: E$100.IN1 E$157.IN2 E$161.IN1
S$90: E$161.IN2 E$162.IN1
S$91: E$162.IN2
S$92: E$163.IN1 E$166.IN1
S$93: E$166.IN2
S$94: E$156.AMINUS E$156.AOUT
S$95: E$156.BMINUS E$156.BOUT
S$96: E$167.P$1 E$168.IN2 E$169.P$1
S$97: E$169.P$2 E$170.IN1
S$98: E$167.P$3 E$174.IN2 E$175.IN2
S$99: E$175.IN1 E$176.IN2 E$177.P$1
S$100: E$177.P$2 E$178.IN1 E$179.P$1
S$101: E$180.IN2 E$181.P$1 E$186.IN1
S$102: E$181.P$2 E$182.IN1 E$183.P$1
S$103: E$183.P$2 E$184.IN1
S$104: E$179.P$2 E$185.IN1
S$105: E$170.IN2 E$171.IN1 E$172.IN2 E$173.IN1
VCC2: E$7.IN1 E$11.VCC E$21.IN2 E$31.IN1 E$35.IN2 E$36.P$3 E$38.IN1 E$44.IN2 E$46.IN2 E$49.IN2 E$60.IN1 E$64.IN2 E$65.P$3 E$68.IN2 E$70.IN2 E$73.CPLUS E$73.VCC E$76.IN1 E$84.IN2 E$89.IN1 E$93.IN2 E$94.P$3 E$97.IN2 E$99.IN2 E$102.IN1 E$111.IN1 E$117.IN1 E$121.IN2 E$122.P$3 E$125.IN2 E$127.IN2 E$156.CPLUS E$156.VCC E$159.IN1 E$168.IN1 E$174.IN1 E$178.IN2 E$179.P$3 E$182.IN2 E$184.IN2

## Tracks (layer width: path | path; a pad name or v marks a point on that pad's centre or on a via)
GND4  (via drill 0.6)
  Top 1.93: 73.66,55.88 E$167.P$2 | 73.66,55.88 v73.66,53.34 73.66,48.26 78.74,48.26 E$172.IN1 | 73.66,55.88 E$171.IN2 | E$172.IN1 E$176.IN1 81.28,50.8 E$177.P$3 | E$172.IN1 78.74,43.18 76.2,43.18 76.2,30.48 78.74,30.48 78.74,27.94 | 78.74,27.94 E$180.IN1 E$183.P$3 | E$183.P$3 E$181.P$3 | E$183.P$3 E$159.IN2 | 76.2,15.24 E$156.GND | 76.2,15.24 76.2,17.78 73.66,17.78 v73.66,25.4 E$102.IN2 E$126.P$3 | E$163.IN2 v76.2,5.08 76.2,15.24 | v78.74,25.4 78.74,27.94 | 55.88,55.88 E$110.P$2 | 55.88,55.88 v55.88,53.34 55.88,48.26 60.96,48.26 E$115.IN1 | 55.88,55.88 E$114.IN2 | E$115.IN1 E$119.IN1 63.5,50.8 E$120.P$3 | E$115.IN1 60.96,43.18 58.42,43.18 58.42,27.94 | E$126.P$3 E$124.P$3 | E$126.P$3 E$123.IN1 58.42,27.94 | 38.1,55.88 E$74.P$2 | 38.1,55.88 v38.1,53.34 38.1,48.26 43.18,48.26 E$80.IN1 | 38.1,55.88 E$79.IN2 | E$80.IN1 E$91.IN1 45.72,50.8 E$92.P$3 | E$80.IN1 43.18,43.18 40.64,43.18 40.64,27.94 | 40.64,27.94 v40.64,25.4 E$83.IN2 | E$98.P$3 E$96.P$3 | E$98.P$3 E$95.IN1 40.64,27.94 | 55.88,15.24 E$73.GND | 55.88,15.24 55.88,17.78 53.34,17.78 v53.34,25.4 48.26,25.4 E$98.P$3 | E$106.IN2 v58.42,5.08 v55.88,5.08 55.88,15.24 | v50.8,5.08 E$87.IN2 | v58.42,25.4 58.42,27.94 | 20.32,55.88 E$18.P$2 | 20.32,55.88 v20.32,53.34 20.32,48.26 25.4,48.26 E$58.IN1 | 20.32,55.88 E$57.IN2 | E$58.IN1 E$62.IN1 27.94,50.8 E$63.P$3 | E$58.IN1 25.4,43.18 22.86,43.18 22.86,27.94 | E$69.P$3 E$67.P$3 | E$69.P$3 E$66.IN1 22.86,27.94 | E$69.P$3 E$48.IN2 v35.56,25.4 | 2.54,55.88 E$3.P$2 | 2.54,55.88 2.54,48.26 7.62,48.26 E$15.IN1 | 2.54,55.88 E$10.IN2 | E$15.IN1 E$33.IN1 10.16,50.8 E$34.P$3 | E$15.IN1 7.62,43.18 5.08,43.18 v5.08,40.64 v5.08,38.1 v5.08,35.56 5.08,27.94
  Top 1.93: 5.08,27.94 E$20.IN2 | E$45.P$3 E$43.P$3 | E$45.P$3 E$40.IN1 5.08,27.94 | 20.32,15.24 E$11.GND | 20.32,15.24 20.32,17.78 17.78,17.78 v17.78,25.4 12.7,25.4 E$45.P$3 | E$53.IN2 v22.86,5.08 v20.32,5.08 20.32,15.24 | E$29.IN2 v15.24,5.08 | v22.86,25.4 22.86,27.94
  Bottom 1.93: v73.66,25.4 v78.74,25.4 | v53.34,25.4 v58.42,25.4 | v55.88,5.08 v50.8,5.08 | v35.56,25.4 v40.64,25.4 | v17.78,25.4 v22.86,25.4 | v15.24,5.08 v20.32,5.08
S$1
  Top 1.93: E$7.IN2 5.08,63.5 5.08,60.96 | E$3.P$1 5.08,60.96 | 5.08,60.96 E$5.P$1
S$2
  Top 1.93: E$5.P$2 12.7,60.96 E$9.IN1
S$3
  Bottom 1.93: 20.32,-5.08 38.1,-5.08
S$4
  Top 1.93: E$9.IN2 E$10.IN1 7.62,55.88 E$15.IN2 E$16.IN1
S$5  (via drill 0.6)
  Top 1.93: E$16.IN2 2.54,45.72 2.54,20.32 10.16,20.32 | 10.16,20.32 v12.7,20.32 E$11.AMINUS | 10.16,20.32 E$19.IN2
S$6
  Top 1.93: E$33.IN2 15.24,53.34 E$32.IN1 15.24,48.26 E$34.P$1
S$7
  Top 1.93: E$11.APLUS 12.7,17.78 12.7,15.24 E$20.IN1 E$21.IN1
S$8  (via drill 0.6)
  Top 1.93: E$11.AOUT v12.7,22.86 10.16,22.86 E$19.IN1 E$22.IN1
S$9  (via drill 0.6)
  Top 1.93: E$18.P$1 22.86,60.96 | 22.86,60.96 22.86,63.5 E$38.IN2 v17.78,63.5 | 22.86,60.96 E$55.P$1
S$10
  Top 1.93: 7.62,10.16 E$11.BMINUS | 7.62,10.16 2.54,10.16 2.54,17.78 E$22.IN2 | 7.62,10.16 E$23.IN1
S$11
  Top 1.93: E$23.IN2 7.62,7.62 E$11.BOUT
S$12
  Top 1.93: E$11.BPLUS E$29.IN1 E$30.IN1
S$14
  Top 1.93: E$3.P$3 E$31.IN2 E$32.IN2
S$15
  Top 1.93: E$47.IN2 27.94,20.32 20.32,20.32 20.32,45.72 E$59.IN2
S$16
  Top 1.93: 22.86,22.86 25.4,22.86 E$2.IN2 E$47.IN1 27.94,22.86 E$50.IN1
S$17
  Top 1.93: E$36.P$1 E$35.IN1 12.7,43.18 E$34.P$2
S$18
  Top 1.93: 22.86,10.16 30.48,10.16 E$52.IN1 35.56,12.7 E$50.IN2
S$19
  Top 1.93: E$75.IN1 E$36.P$2
S$20
  Top 1.93: E$43.P$1 10.16,33.02 E$40.IN2 10.16,38.1 E$37.IN1
S$22
  Top 1.93: E$52.IN2 30.48,7.62 22.86,7.62
S$23
  Top 1.93: E$45.P$1 E$44.IN1 15.24,35.56 E$43.P$2
S$24  (via drill 0.6)
  Top 1.93: E$45.P$2 v17.78,30.48 E$46.IN1
S$26
  Top 1.93: 22.86,12.7 E$53.IN1 E$54.IN1
S$28
  Top 1.93: E$55.P$2 30.48,60.96 E$56.IN1
S$29  (via drill 0.6)
  Top 1.93: E$74.P$1 40.64,60.96 | 40.64,60.96 40.64,63.5 E$76.IN2 v35.56,63.5 | 40.64,60.96 E$77.P$1
S$30
  Top 1.93: 30.48,15.24 E$48.IN1 | 30.48,15.24 25.4,15.24 25.4,17.78 E$11.CPLUS | 30.48,15.24 E$49.IN1
S$31
  Top 1.93: E$18.P$3 E$60.IN2 E$61.IN2
S$32
  Top 1.93: E$62.IN2 33.02,53.34 E$61.IN1 33.02,48.26 E$63.P$1
S$33
  Top 1.93: E$65.P$1 E$64.IN1 30.48,43.18 E$63.P$2
S$34
  Top 1.93: E$67.P$1 27.94,33.02 E$66.IN2 27.94,38.1 E$72.IN1
S$35
  Top 1.93: E$69.P$1 E$68.IN1 33.02,35.56 E$67.P$2
S$36  (via drill 0.6)
  Top 1.93: E$69.P$2 v35.56,30.48 E$70.IN1
S$37
  Top 1.93: E$71.IN1 E$65.P$2
S$38
  Top 1.93: E$56.IN2 E$57.IN1 25.4,55.88 E$58.IN2 E$59.IN1
S$39
  Top 1.93: E$77.P$2 48.26,60.96 E$78.IN1
S$40  (via drill 0.6)
  Top 1.93: E$81.IN2 38.1,45.72 38.1,20.32 45.72,20.32 | 45.72,20.32 v48.26,20.32 E$73.AMINUS | 45.72,20.32 E$82.IN2
S$41
  Top 1.93: E$73.APLUS 48.26,17.78 48.26,15.24 E$83.IN1 E$84.IN1
S$42  (via drill 0.6)
  Top 1.93: E$73.AOUT v48.26,22.86 45.72,22.86 E$82.IN1 E$85.IN1
S$43
  Top 1.93: 43.18,10.16 E$73.BMINUS | 43.18,10.16 38.1,10.16 38.1,17.78 E$85.IN2 | 43.18,10.16 E$86.IN1
S$44
  Top 1.93: E$86.IN2 43.18,7.62 E$73.BOUT
S$45
  Top 1.93: E$73.BPLUS E$87.IN1 E$88.IN1
S$47
  Top 1.93: E$74.P$3 E$89.IN2 E$90.IN2
S$48
  Top 1.93: E$91.IN2 50.8,53.34 E$90.IN1 50.8,48.26 E$92.P$1
S$49
  Top 1.93: E$94.P$1 E$93.IN1 48.26,43.18 E$92.P$2
S$50
  Top 1.93: E$96.P$1 45.72,33.02 E$95.IN2 45.72,38.1 E$109.IN1
S$51
  Top 1.93: E$98.P$1 E$97.IN1 50.8,35.56 E$96.P$2
S$52  (via drill 0.6)
  Top 1.93: E$98.P$2 v53.34,30.48 E$99.IN1
S$53
  Top 1.93: E$108.IN1 E$94.P$2
S$54
  Top 1.93: E$78.IN2 E$79.IN1 43.18,55.88 E$80.IN2 E$81.IN1
S$55
  Top 1.93: 58.42,22.86 60.96,22.86 60.96,25.4 E$101.IN1 63.5,22.86 E$104.IN1
S$56
  Top 1.93: 58.42,10.16 68.58,10.16 E$105.IN1 E$104.IN2
S$57
  Top 1.93: E$105.IN2 68.58,7.62 58.42,7.62
S$58
  Top 1.93: 58.42,12.7 E$106.IN1 E$107.IN1
S$60
  Top 1.93: E$101.IN2 63.5,20.32 55.88,20.32 55.88,45.72 E$116.IN2
S$61
  Top 1.93: E$100.IN2 86.36,20.32 76.2,20.32 76.2,27.94 73.66,27.94 73.66,45.72 E$173.IN2
S$62  (via drill 0.6)
  Top 1.93: E$110.P$1 58.42,60.96 | 58.42,60.96 58.42,63.5 E$111.IN2 v53.34,63.5 | 58.42,60.96 E$112.P$1
S$63
  Top 1.93: E$112.P$2 66.04,60.96 E$113.IN1
S$64
  Top 1.93: E$110.P$3 E$117.IN2 E$118.IN2
S$65
  Top 1.93: E$119.IN2 68.58,53.34 E$118.IN1 68.58,48.26 E$120.P$1
S$66
  Top 1.93: E$122.P$1 E$121.IN1 66.04,43.18 E$120.P$2
S$67
  Top 1.93: E$124.P$1 63.5,33.02 E$123.IN2 63.5,38.1 E$129.IN1
S$68
  Top 1.93: E$126.P$1 E$125.IN1 68.58,35.56 E$124.P$2
S$69  (via drill 0.6)
  Top 1.93: E$126.P$2 v71.12,30.48 E$127.IN1
S$70
  Top 1.93: E$128.IN1 E$122.P$2
S$71
  Top 1.93: E$113.IN2 E$114.IN1 60.96,55.88 E$115.IN2 E$116.IN1
S$89
  Top 1.93: 78.74,22.86 81.28,22.86 | 81.28,22.86 86.36,22.86 | 86.36,22.86 E$161.IN1 | 81.28,22.86 E$157.IN2 | 86.36,22.86 E$100.IN1
S$90
  Top 1.93: 78.74,10.16 88.9,10.16 E$162.IN1 E$161.IN2
S$91
  Top 1.93: E$162.IN2 88.9,7.62 78.74,7.62
S$92
  Top 1.93: 78.74,12.7 E$163.IN1 E$166.IN1
S$94
  Top 1.93: E$156.AOUT E$156.AMINUS
S$95
  Top 1.93: E$156.BOUT E$156.BMINUS 71.12,5.08
S$96  (via drill 0.6)
  Top 1.93: E$167.P$1 76.2,60.96 | 76.2,60.96 76.2,63.5 E$168.IN2 v71.12,63.5 | 76.2,60.96 E$169.P$1
S$97
  Top 1.93: E$169.P$2 83.82,60.96 E$170.IN1
S$98
  Top 1.93: E$167.P$3 E$174.IN2 E$175.IN2
S$99
  Top 1.93: E$176.IN2 86.36,53.34 E$175.IN1 86.36,48.26 E$177.P$1
S$100
  Top 1.93: E$179.P$1 E$178.IN1 83.82,43.18 E$177.P$2
S$101
  Top 1.93: E$181.P$1 81.28,33.02 E$180.IN2 81.28,38.1 E$186.IN1
S$102
  Top 1.93: E$183.P$1 E$182.IN1 86.36,35.56 E$181.P$2
S$103  (via drill 0.6)
  Top 1.93: E$183.P$2 v88.9,30.48 E$184.IN1
S$104
  Top 1.93: E$185.IN1 E$179.P$2
S$105
  Top 1.93: E$170.IN2 E$171.IN1 78.74,55.88 E$172.IN2 E$173.IN1
S$106  (via drill 0.6)
  other vias: 2.54,66.04
S$107
  Bottom 1.93: 60.96,-5.08 78.74,-5.08
S$114
  Bottom 1.93: 40.64,-5.08 58.42,-5.08
S$115
  Bottom 1.93: 0,-5.08 17.78,-5.08
VCC2  (via drill 0.6)  (1 unrouted)
  Top 1.93: E$94.P$3 E$97.IN2 E$99.IN2 E$93.IN2 v53.34,48.26 53.34,60.96 50.8,60.96 E$89.IN1 | E$89.IN1 v53.34,66.04 | E$73.VCC 53.34,15.24 53.34,2.54 | 53.34,2.54 v63.5,2.54 v66.04,2.54 v71.12,2.54 | 33.02,2.54 40.64,2.54 | 40.64,2.54 53.34,2.54 | 40.64,2.54 E$84.IN2 | E$122.P$3 E$125.IN2 E$127.IN2 E$121.IN2 v71.12,48.26 71.12,60.96 68.58,60.96 E$117.IN1 | E$36.P$3 E$44.IN2 E$46.IN2 E$35.IN2 v17.78,48.26 17.78,60.96 15.24,60.96 E$31.IN1 | 33.02,2.54 E$49.IN2 | E$11.VCC 17.78,15.24 17.78,2.54 | 17.78,2.54 v27.94,2.54 33.02,2.54 | v2.54,2.54 v5.08,2.54 | v5.08,2.54 17.78,2.54 | v5.08,2.54 E$21.IN2 | E$31.IN1 10.16,66.04 | 10.16,66.04 E$7.IN1 | E$65.P$3 E$68.IN2 E$70.IN2 E$64.IN2 v35.56,48.26 35.56,60.96 33.02,60.96 E$60.IN1 | E$102.IN1 v66.04,15.24 60.96,15.24 60.96,17.78 E$73.CPLUS | v83.82,15.24 E$159.IN1 E$156.CPLUS | v71.12,2.54 v83.82,2.54 | 27.94,66.04 v17.78,66.04 E$31.IN1 | 27.94,66.04 E$38.IN1 | E$60.IN1 27.94,66.04 | 45.72,66.04 v35.56,66.04 E$60.IN1 | 45.72,66.04 E$76.IN1 | E$89.IN1 45.72,66.04 | 63.5,66.04 v53.34,66.04 | v53.34,66.04 E$89.IN1 | 63.5,66.04 E$111.IN1 | E$117.IN1 63.5,66.04 | 81.28,66.04 E$168.IN1 | E$179.P$3 E$182.IN2 E$184.IN2 E$178.IN2 88.9,66.04 E$174.IN1 81.28,66.04 | 81.28,66.04 v71.12,66.04 E$117.IN1 | E$156.VCC 73.66,15.24 73.66,2.54 v71.12,2.54 | 10.16,66.04 v7.62,66.04 v5.08,66.04
  Bottom 1.93: v66.04,2.54 v66.04,15.24 | v83.82,2.54 v83.82,15.24

## Text on the board
Unrouted: X | X
tPlace: 3906 | 3906 | 3906 | 3906 | 3906 | 3904 | 3906 | 3904 | 3906 | 3904 | 3906 | 3904 | 3906 | 3904 | 3904 | 3904 | 3904 | 3904 | 3904 | 3904 | 3904 | 3904 | 3904 | 3904 | 5K | 5K